# EAGLE board Putri Shaqila_minimumSystem (EAGLE 9.6.2)
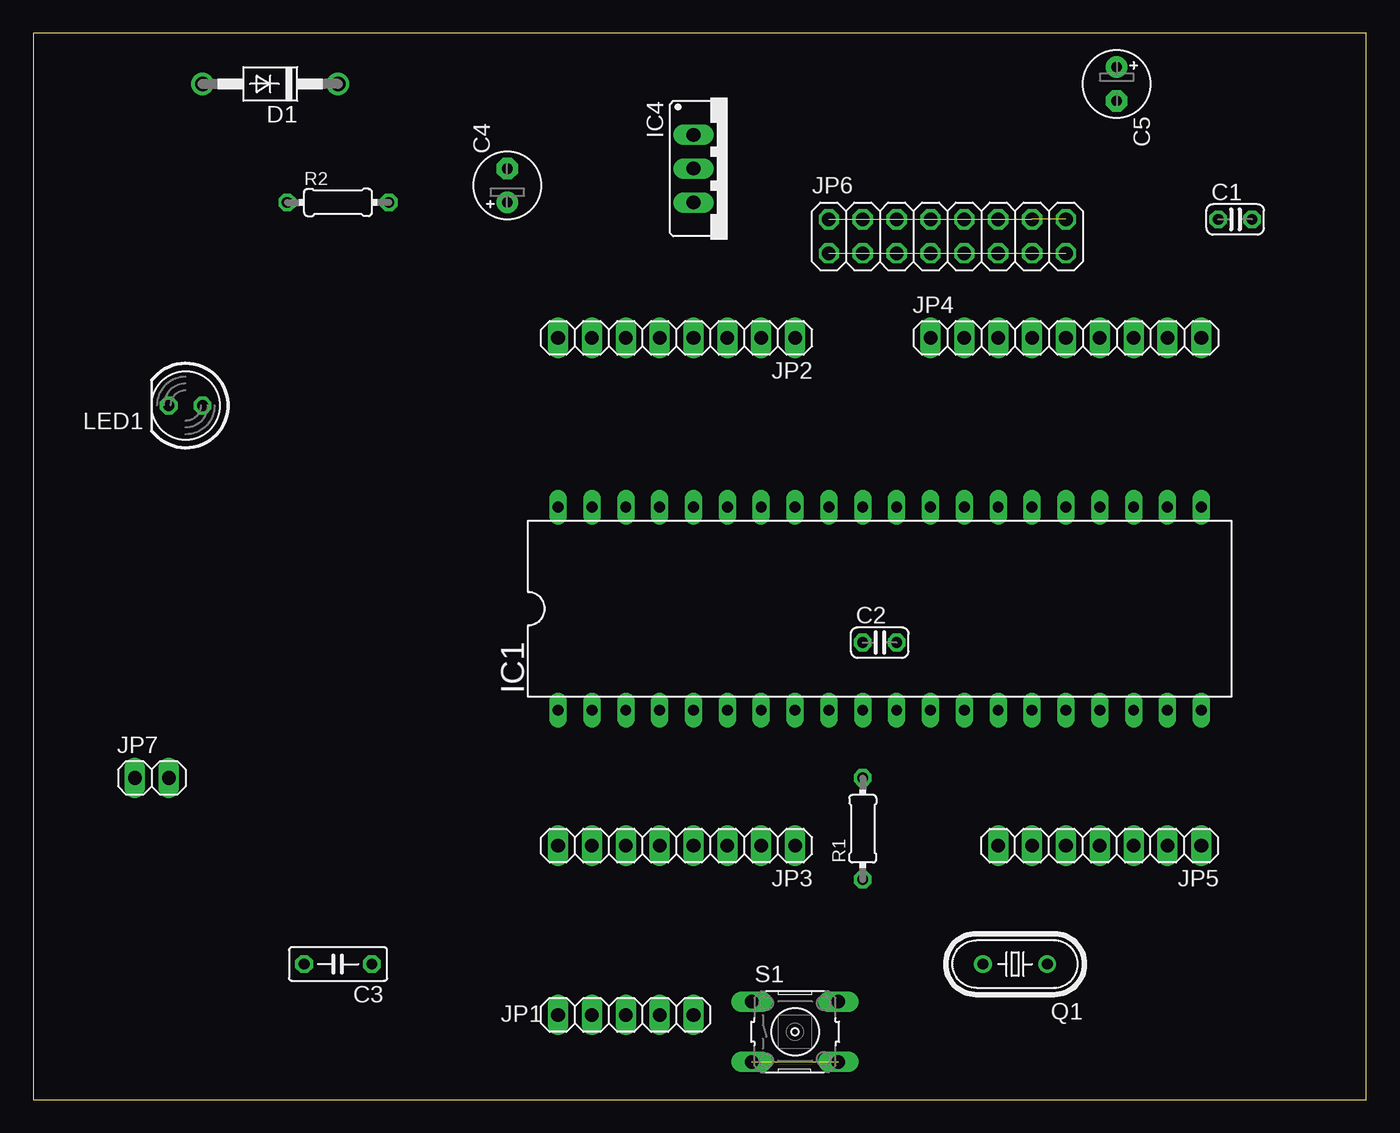
[diagram p0: board, top side]
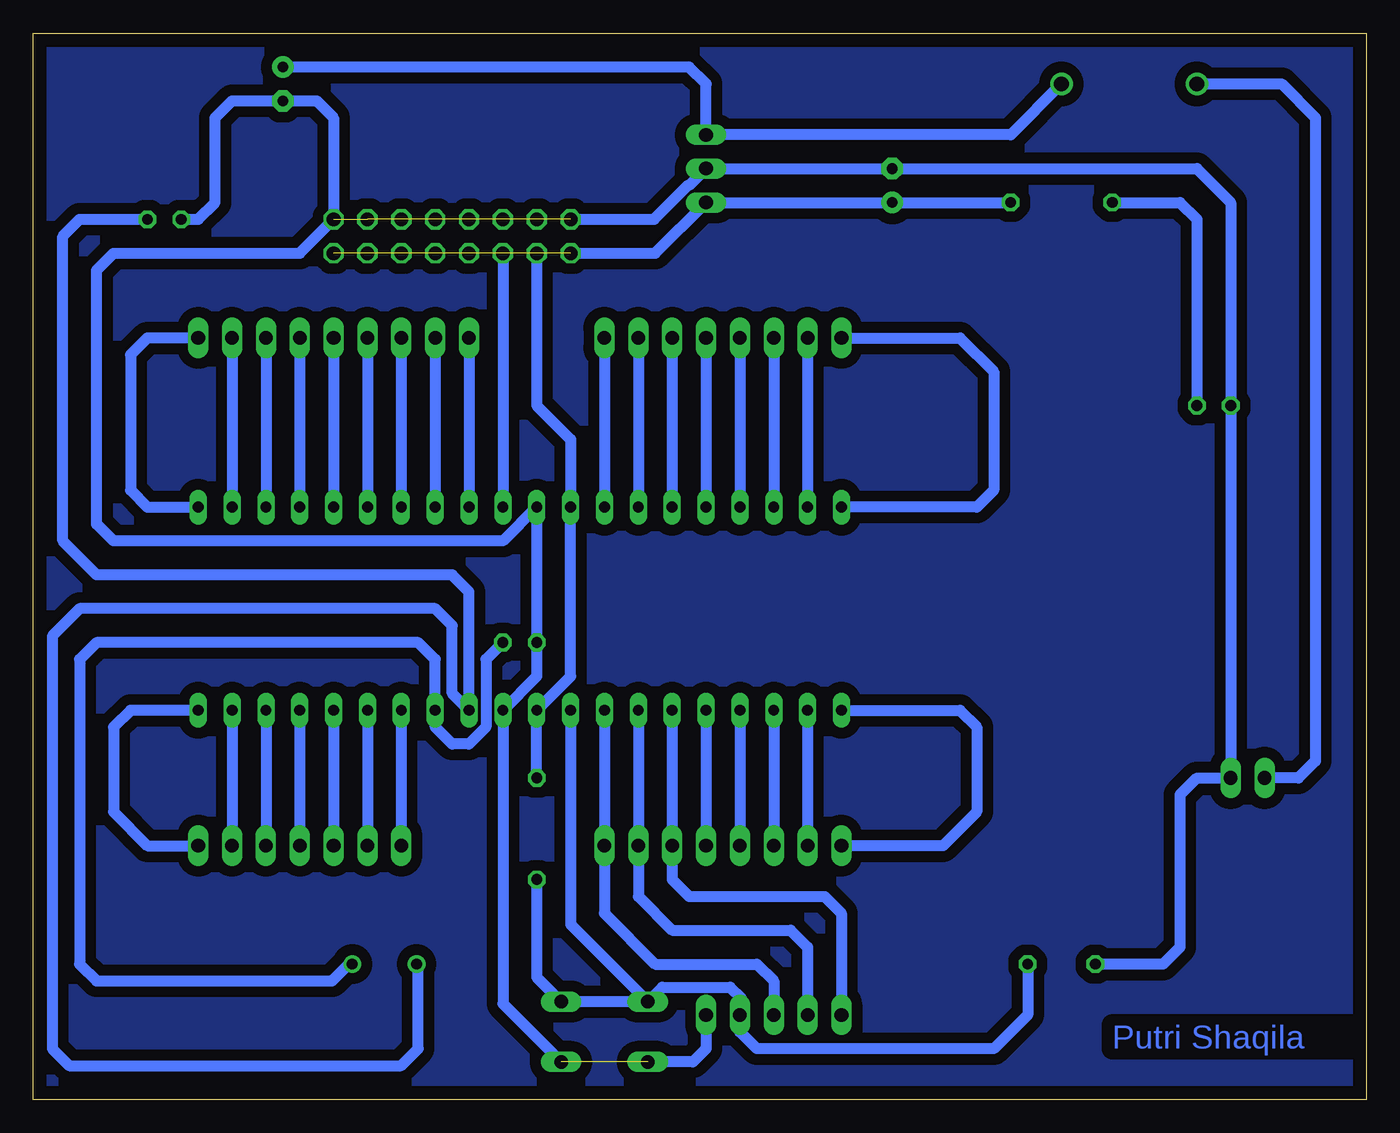
[diagram p1: board, bottom side, seen from below]

Size 100 x 80 mm. Coordinates in mm from the lower left corner, seen from the top.
Outline: 0,0 100,0 100,80 0,80 0,0
Copper layers (1*16): Top 0.035mm / dielectric 1.5mm / Bottom 0.035mm
Design rules "default": minimum track width 6mil, minimum drill 0.35mm, track to track 6mil, track to pad 6mil, pad to pad 6mil, via to via 6mil, smd to smd 6mil, copper to edge 40mil, drill to drill 6mil, minimum pad ring 10mil, minimum via ring 8mil, stop-mask expansion 4mil, vias tented up to drill 0mil, thermal gap 10mil

## Footprints (pad centres in the part's own frame; a part is rotated, then mirrored left to right if it is on the bottom)
C025-024X044 = drill 0.813 octagon: 1 -1.27,0; 2 1.27,0
C050-025X075 = drill 0.813 octagon: 1 -2.54,0; 2 2.54,0
E2,5-5 = drill 0.813 pad 1.6: + -1.27,0 | drill 0.813 pad 1.6 octagon: - 1.27,0
DO41-10 = drill 1.118: A 5.08,0; C -5.08,0
DIL40 = drill 0.813 long: 1 -24.13,-7.62; 2 -21.59,-7.62; 3 -19.05,-7.62; 4 -16.51,-7.62; 5 -13.97,-7.62; 6 -11.43,-7.62; 7 -8.89,-7.62; 8 -6.35,-7.62; 9 -3.81,-7.62; 10 -1.27,-7.62; 11 1.27,-7.62; 12 3.81,-7.62; 13 6.35,-7.62; 14 8.89,-7.62; 15 11.43,-7.62; 16 13.97,-7.62; 17 16.51,-7.62; 18 19.05,-7.62; 19 21.59,-7.62; 20 24.13,-7.62; 21 24.13,7.62; 22 21.59,7.62; 23 19.05,7.62; 24 16.51,7.62; 25 13.97,7.62; 26 11.43,7.62; 27 8.89,7.62; 28 6.35,7.62; 29 3.81,7.62; 30 1.27,7.62; 31 -1.27,7.62; 32 -3.81,7.62; 33 -6.35,7.62; 34 -8.89,7.62; 35 -11.43,7.62; 36 -13.97,7.62; 37 -16.51,7.62; 38 -19.05,7.62; 39 -21.59,7.62; 40 -24.13,7.62
78XXS = drill 1.016 long: GND 0,-2.54; IN -2.54,-2.54; OUT 2.54,-2.54
1X05 = drill 1.016 long: 1 -5.08,0; 2 -2.54,0; 3 0,0; 4 2.54,0; 5 5.08,0
1X08 = drill 1.016 long: 1 -8.89,0; 2 -6.35,0; 3 -3.81,0; 4 -1.27,0; 5 1.27,0; 6 3.81,0; 7 6.35,0; 8 8.89,0
1X09 = drill 1.016 long: 1 -10.16,0; 2 -7.62,0; 3 -5.08,0; 4 -2.54,0; 5 0,0; 6 2.54,0; 7 5.08,0; 8 7.62,0; 9 10.16,0
1X07 = drill 1.016 long: 1 -7.62,0; 2 -5.08,0; 3 -2.54,0; 4 0,0; 5 2.54,0; 6 5.08,0; 7 7.62,0
2X08 = drill 1.016 octagon: 1 -8.89,-1.27; 2 -8.89,1.27; 3 -6.35,-1.27; 4 -6.35,1.27; 5 -3.81,-1.27; 6 -3.81,1.27; 7 -1.27,-1.27; 8 -1.27,1.27; 9 1.27,-1.27; 10 1.27,1.27; 11 3.81,-1.27; 12 3.81,1.27; 13 6.35,-1.27; 14 6.35,1.27; 15 8.89,-1.27; 16 8.89,1.27
1X02 = drill 1.016 long: 1 -1.27,0; 2 1.27,0
LED5MM = drill 0.813 octagon: A -1.27,0; K 1.27,0
HC49U-V = drill 0.813: 1 -2.413,0; 2 2.413,0
0204/7 = drill 0.813 octagon: 1 -3.81,0; 2 3.81,0
B3F-10XX = drill 1.016 long: 1 -3.251,2.261; 2 3.251,2.261; 3 -3.251,-2.261; 4 3.251,-2.261

## Placement (x,y rotation side)
C1  [C025-024X044]  90.17,66.04 0 top
C2  [C025-024X044]  63.5,34.29 0 top
C3  [C050-025X075]  22.86,10.16 180 top
C4  [E2,5-5]  35.56,68.58 90 top
C5  [E2,5-5]  81.28,76.2 270 top
D1  1N4004  [DO41-10]  17.78,76.2 180 top
IC1  MEGA16-P  [DIL40]  63.5,36.83 0 top
IC4  [78XXS]  52.07,69.85 270 top
JP1  [1X05]  44.45,6.35 180 top
JP2  [1X08]  48.26,57.15 180 top
JP3  [1X08]  48.26,19.05 180 top
JP4  [1X09]  77.47,57.15 0 top
JP5  [1X07]  80.01,19.05 180 top
JP6  [2X08]  68.58,64.77 0 top
JP7  [1X02]  8.89,24.13 0 top
LED1  [LED5MM]  11.43,52.07 180 top
Q1  [HC49U-V]  73.66,10.16 180 top
R1  [0204/7]  62.23,20.32 90 top
R2  [0204/7]  22.86,67.31 0 top
S1  [B3F-10XX]  57.15,5.08 0 top

## Library data of the parts
C1 C2 C4 C5 R1 R2 = rcl
C3 = resistor
D1 = diode
IC1 = atmel; MPN: ATMEGA16-16PU; OC_FARNELL: 9171142; OC_NEWARK: 01M6885
IC4 = v-reg
JP1-JP7 = pinhead
LED1 = led
Q1 = crystal; OC_FARNELL: 1666969; OC_NEWARK: unknown
S1 = switch-omron; MPN: B3F-1000; OC_FARNELL: 176432; OC_NEWARK: 36M3542

## Nets
+5V: C4.+ IC1.10 IC1.30 IC1.32 IC4.OUT JP6.1 JP6.3 JP6.5 JP6.7 JP6.9 JP6.11 JP6.13 JP6.15 R1.2 R2.2
+12V: D1.A JP7.1
C0: IC1.22 JP4.8
C1: IC1.23 JP4.7
C2: IC1.24 JP4.6
C3: IC1.25 JP4.5
D7: IC1.14 JP5.7
GND: C1.1 C2.1 C3.2 C4.- C5.- IC1.11 IC1.31 IC4.GND JP1.1 JP6.2 JP6.4 JP6.6 JP6.8 JP6.10 JP6.12 JP6.14 JP6.16 JP7.2 LED1.K S1.3 S1.4
N$1: IC1.33 JP2.1
N$2: IC1.34 JP2.2
N$3: IC1.35 JP2.3
N$4: IC1.36 JP2.4
N$5: IC1.37 JP2.5
N$6: IC1.38 JP2.6
N$7: IC1.39 JP2.7
N$8: IC1.40 JP2.8
N$11: IC1.29 JP4.1
N$12: IC1.28 JP4.2
N$13: IC1.27 JP4.3
N$14: IC1.5 JP3.4
N$15: IC1.20 JP5.1
N$16: IC1.19 JP5.2
N$19: IC1.26 JP4.4
N$20: IC1.6 JP1.5 JP3.3
N$21: IC1.4 JP3.5
N$22: IC1.3 JP3.6
N$23: IC1.2 JP3.7
N$24: IC1.1 JP3.8
N$25: C5.+ D1.C IC4.IN
N$30: IC1.15 JP5.6
N$31: IC1.16 JP5.5
N$32: IC1.17 JP5.4
N$33: C3.1 IC1.9 JP1.2 R1.1 S1.1 S1.2
N$34: IC1.18 JP5.3
N$35: C1.2 IC1.12 Q1.2
N$36: C2.2 IC1.13 Q1.1
N$37: LED1.A R2.1
N$46: IC1.8 JP1.3 JP3.1
N$47: IC1.7 JP1.4 JP3.2
RS: IC1.21 JP4.9

## Tracks (layer width: path | path; a pad name or v marks a point on that pad's centre or on a via)
+5V  (7 unrouted)
  Bottom 0.813: JP6.1 53.34,63.5 IC4.OUT C4.+ R2.2 | JP6.5 IC1.30 | JP6.3 62.23,52.07 59.69,49.53 IC1.32 59.69,31.75 IC1.10 R1.2
+12V
  Bottom 0.813: D1.A 6.35,76.2 3.81,73.66 3.81,25.4 5.08,24.13 JP7.1
C0
  Bottom 0.813: JP4.8 IC1.22
C1
  Bottom 0.813: JP4.7 IC1.23
C2
  Bottom 0.813: JP4.6 IC1.24
C3
  Bottom 0.813: JP4.5 IC1.25
D7
  Bottom 0.813: IC1.14 JP5.7
GND  (8 unrouted)
  Bottom 0.813: JP6.2 53.43,66.04 50.84,68.63 50.75,68.63 IC4.GND C4.- 12.7,69.85 10.16,67.31 LED1.K JP7.2 12.7,24.13 13.97,22.86 13.97,11.43 15.24,10.16 C3.2 | JP1.1 49.53,3.81 50.52,2.82 S1.3 | C1.1 87.63,66.04 86.36,67.31 86.36,73.66 85.09,74.93 C5.- 78.74,74.93 77.47,73.66 JP6.16 80.01,63.5 93.98,63.5 95.25,62.23 95.25,43.18 93.98,41.91 64.77,41.91 IC1.31 C2.1 62.23,31.75 IC1.11 64.77,7.19 S1.4
N$1
  Bottom 0.813: JP2.1 IC1.33
N$2
  Bottom 0.813: JP2.2 IC1.34
N$3
  Bottom 0.813: JP2.3 IC1.35
N$4
  Bottom 0.813: JP2.4 IC1.36
N$5
  Bottom 0.813: JP2.5 IC1.37
N$6
  Bottom 0.813: JP2.6 IC1.38
N$7
  Bottom 0.813: JP2.7 IC1.39
N$8
  Bottom 0.813: JP2.8 30.48,57.15 27.94,54.61 27.94,45.72 29.21,44.45 IC1.40
N$9
  pour Bottom (isolate 0.813): 0,80.01 0,0 100.33,0 100.33,80.01
N$11
  Bottom 0.813: JP4.1 IC1.29
N$12
  Bottom 0.813: JP4.2 IC1.28
N$13
  Bottom 0.813: JP4.3 IC1.27
N$14
  Bottom 0.813: IC1.5 JP3.4
N$15
  Bottom 0.813: IC1.20 92.71,29.21 93.98,27.94 93.98,21.59 91.44,19.05 JP5.1
N$16
  Bottom 0.813: IC1.19 JP5.2
N$19
  Bottom 0.813: JP4.4 IC1.26
N$20
  Bottom 0.813: IC1.6 JP3.3 52.07,16.51 50.8,15.24 40.64,15.24 39.37,13.97 JP1.5
N$21
  Bottom 0.813: IC1.4 JP3.5
N$22
  Bottom 0.813: IC1.3 JP3.6
N$23
  Bottom 0.813: IC1.2 JP3.7
N$24
  Bottom 0.813: IC1.1 30.48,29.21 29.21,27.94 29.21,21.59 31.75,19.05 JP3.8
N$25
  Bottom 0.813: D1.C 26.67,72.39 IC4.IN 49.53,76.2 50.8,77.47 C5.+
N$30
  Bottom 0.813: IC1.15 JP5.6
N$31
  Bottom 0.813: IC1.16 JP5.5
N$32
  Bottom 0.813: IC1.17 JP5.4
N$33
  Bottom 0.813: C3.1 25.4,6.35 27.94,3.81 45.72,3.81 46.99,5.08 JP1.2 46.99,7.62 46.9,7.62 47.71,8.43 52.81,8.43 S1.1 | S1.1 59.69,13.13 IC1.9 | R1.1 62.23,9.17 S1.2 S1.1
N$34
  Bottom 0.813: IC1.18 JP5.3
N$35
  Bottom 0.813: C1.2 96.52,66.04 97.79,64.77 97.79,41.91 95.25,39.37 68.58,39.37 67.31,38.1 IC1.12 68.58,30.48 68.58,35.56 69.85,36.83 96.52,36.83 98.58,34.77 98.58,3.81 97.31,2.54 72.39,2.54 71.12,3.81 71.12,10.03 Q1.2
N$36
  Bottom 0.813: Q1.1 76.2,10.29 77.6,8.89 95.25,8.89 96.52,10.16 96.52,33.02 95.25,34.29 71.12,34.29 69.85,33.02 IC1.13 69.85,27.94 68.58,26.67 67.31,26.67 66.04,27.94 66.04,33.02 C2.2
N$37
  Bottom 0.813: R2.1 13.97,67.31 12.7,66.04 LED1.A
N$46
  Bottom 0.813: IC1.8 JP3.1 57.15,13.97 53.34,10.16 45.72,10.16 44.45,8.89 JP1.3
N$47
  Bottom 0.813: IC1.7 JP3.2 54.61,15.24 52.07,12.7 43.18,12.7 41.91,11.43 JP1.4
RS
  Bottom 0.813: JP4.9 91.44,57.15 92.71,55.88 92.71,45.72 91.44,44.45 IC1.21

## Text on the board
Bottom: Putri Shaqila